# Altium PCB 175-00032, rev1 4-Chan Current Driver.PcbDoc (part 2 of 2)
Units mil, origin at the board's own origin, x right, y up, seen from the top; angles counter-clockwise.
Board outline 3307.09 x 1515.75 mil, 6 copper layers (Top Layer  (*GTL), Mid-Layer 1 (*G1), Internal Plane 1 (*.GP1), InternalPlane2 (*GP2), InternalPlane3 (*.GP3), Bottom Layer  (*GBL)); 61 components, 44 nets, 304 pads, 99 vias.
Unrouted connection lines stored in the file: 1.
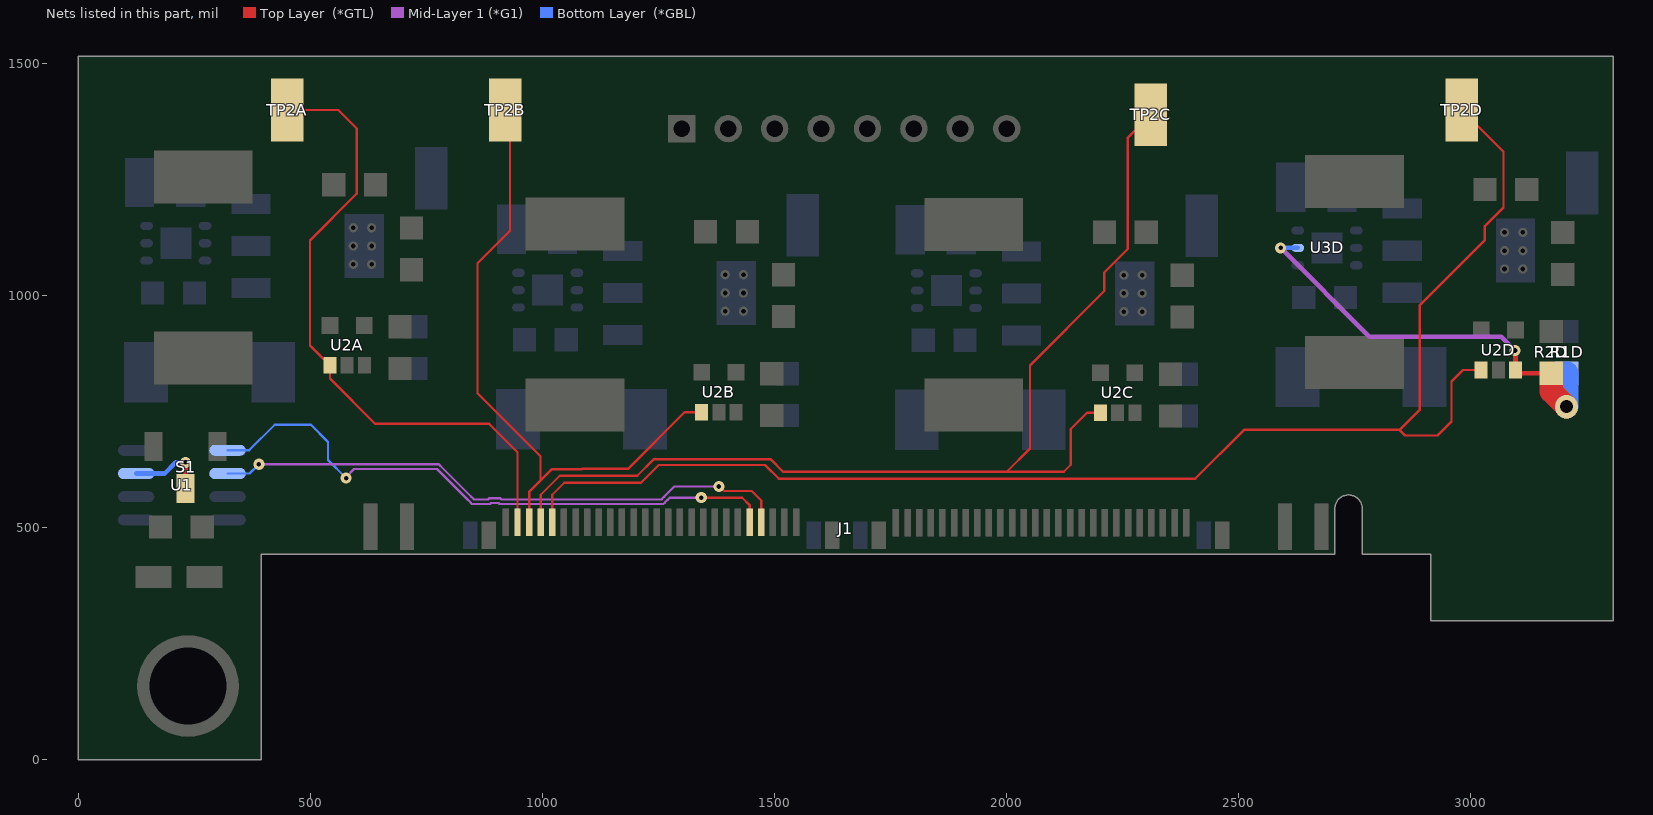
[diagram p6: the nets of this part, all layers, seen from the top]

## Via types
v1: diameter 24, hole 10, Top Layer  (*GTL) to Bottom Layer  (*GBL), 57 vias
v2: diameter 50, hole 28, Top Layer  (*GTL) to Bottom Layer  (*GBL), 38 vias
v3: diameter 28, hole 13, Top Layer  (*GTL) to Bottom Layer  (*GBL), 4 vias

## Nets (pads, with @x,y where several pads share a name; then routed paths per layer and width w, separated by ;. In a path a pad name is that pad's centre, name@x,y a point inside that pad or via, vN(x,y) a via of type N, cw(c..) or ccw(c..) an arc to the next point about the centre after c; other vN are vias at no path point) (continued)
NetR1D_2: R1D.2 R2D.1 U2D.3 U3D.2 | length 915.9
  Top Layer  (*GTL) w10: v1(3095,882) 3096,883 U2D.3@3096,840 3103,833 R2D.1@3173,833
  Top Layer  (*GTL) w50: R2D.1@3173,833 3173,794 v2(3206,761)
  Mid-Layer 1 (*G1) w10: v1(2590,1103) 2781,912 3065,912 v1(3095,882)
  Bottom Layer  (*GBL) w10: v1(2590,1103) U3D.2@2627.01,1103
  Bottom Layer  (*GBL) w50: v2(3206,761) 3207,762 R1D.2@3207,833
NetS1_2: S1.2 U1.7 | length 172.6
  Top Layer  (*GTL) w10: S1.2@231,584.72 v1(231,641)
  Bottom Layer  (*GBL) w10: U1.7@124.57,617 186,617 210,641 v1(231,641)
SLOT_ID0: J1.44 U1.1 | length 1310.4
  Top Layer  (*GTL) w5: v1(1342,565) 1430.31,565 1446.09,549.21 J1.44@1446.09,512.06
  Mid-Layer 1 (*G1) w5: v1(577,607) 577,609.79 594,626.79 772.79,626.79 839.57,560 842.5,557.07 845.43,554.14 848.36,551.21 886.64,551.21 888.92,553.5 905.08,553.5 907.36,551.21 1260.21,551.21 1263.14,554.14 1266.07,557.07 1269,560 1274,565 v1(1342,565)
  Bottom Layer  (*GBL) w5: U1.1@321.43,667 368,667 423,722 501,722 538,685 538,646 v1(577,607)
SLOT_ID1: J1.46 U1.2 | length 1262.1
  Top Layer  (*GTL) w5: v1(1380,589) 1382,589 1391.5,579.5 1450.59,579.5 1471.09,559 J1.46@1471.09,512.06
  Mid-Layer 1 (*G1) w5: v1(389,637) 389.21,636.79 776.93,636.79 779.86,633.86 846.64,567.07 849.57,564.14 852.5,561.21 882.49,561.21 884.78,563.5 909.22,563.5 911.51,561.21 1256.07,561.21 1259,564.14 1261.93,567.07 1283.86,589 v1(1380,589)
  Bottom Layer  (*GBL) w5: U1.2@321.43,617 369,617 v1(389,637)
V_IMON1: J1.4 TP2A.1 U2A.1 | length 1387.5
  Top Layer  (*GTL) w5: TP2A.1@450,1400 560,1400 600,1360 600,1220 499,1119 499,893 U2A.1@542,850 542,821.42 639.42,724 885,724 946.09,662.91 J1.4@946.09,510
V_IMON2: J1.6 TP2B.1 U2B.1 | length 1395.7
  Top Layer  (*GTL) w5: TP2B.1@920,1400 930,1390 930,1140 860,1070 860,790 995.8,654.2 995.8,601.8 ; J1.6@971.09,512.06 971.09,577.09 995.8,601.8 ; U2B.1@1343,749 1306,749 1184,627 1084.96,627 1084.46,626.5 1020.5,626.5 995.8,601.8
V_IMON3: J1.8 TP2C.1 U2C.1 | length 2303.7
  Top Layer  (*GTL) w5: J1.8@996.09,512.06 996.09,571.09 1037,612 1204,612 1240,648 1491,648 1518,621 2000,621 ; U2C.1@2202,748 2173,748 2138,713 2138,636 2123,621 2050,621 2000,621 ; TP2C.1@2310,1390 2261,1341 2261,1101 2210,1050 2210,1010 2050,850 2050,670 2049,670 2000,621
V_IMON4: J1.10 TP2D.1 U2D.1 | length 3080.1
  Top Layer  (*GTL) w5: J1.10@1021.09,512.06 1021.09,571.09 1047,597 1212,597 1250.5,635.5 1479.5,635.5 1509,606 2406,606 2511,711 2846,711 ; 2890,760 2890,755 ; TP2D.1@2980,1400 3070,1310 3070,1190 3030,1150 3030,1120 2890,980 2890,755 ; U2D.1@3022,840 2983,840 2958,815 2958,729 2928,699 2890,699 2858,699 2846,711 ; 2846,711 2890,755
pads on no net: J1.3 J1.5 J1.7 J1.9 J1.13 J1.14 J1.15 J1.16 J1.17 J1.18 J1.19 J1.20 J1.23 J1.24 J1.25 J1.26 J1.27 J1.28 J1.29 J1.30 J1.33 J1.34 J1.35 J1.36 J1.37 J1.38 J1.39 J1.40 J1.55 J1.56 J1.57 J1.58 J1.59 J1.60 J1.61 J1.62 J1.65 J1.66 J1.67 J1.68 J1.69 J1.70 J1.71 J1.72 J1.75 J1.76 J1.77 J1.78 J1.79 J1.80 J1.81 J1.82 J1.85 J1.86 J1.87 J1.88 J1.89 J1.90 J1.91 J1.92 J1.95 J1.96 J1.97 J1.98 J1.99 J1.100 J1.101 J1.102

## Polygon pours and split planes (outlines as drawn)
I_RTN4 on Internal Plane 1 (*.GP1) (split plane): 2844.9,1305.1 1855.1,1305.1 1855.1,1460 1855.1,1484.9 2844.9,1484.9
I_RTN3 on Internal Plane 1 (*.GP1) (split plane): 1844.9,1454.91 1844.9,1300 1845.29,1298.05 1846.4,1296.4 1848.05,1295.29 1850,1294.9 2004.9,1294.9 2004.9,1195.1 1655.15,1195.1 1657.64,1455.13
I_RTN2 on Internal Plane 1 (*.GP1) (split plane): 1644.95,1195.1 955.1,1195.1 955.1,1308 954.92,1308.9 1450,1308.9 1451.95,1309.29 1453.6,1310.4 1454.71,1312.05 1455.1,1314 1455.1,1454.9 1647.44,1454.9
I_RTN1 on Internal Plane 1 (*.GP1) (split plane): 1444.9,1319.1 195.1,1319.1 195.1,1444.94 1444.9,1454.86
GND on Internal Plane 1 (*.GP1) (split plane): 3286.99,442.91 3286.99,320.1 2933.48,320.1 2933.48,442.91 2933.1,446.83 2931.95,450.6 2930.1,454.08 2927.6,457.12 2924.55,459.62 2921.08,461.48 2917.31,462.62 2913.39,463.01 2785.95,463.01 2785.95,541.34 2785.9,541.78 2785.62,546.89 2784.68,552.38 2783.14,557.72 2781.01,562.86 2778.32,567.73 2775.1,572.27 2771.4,576.42 2767.25,580.12 2762.71,583.34 2757.84,586.03 2752.7,588.16 2747.36,589.7 2741.88,590.63 2736.32,590.94 2730.77,590.63 2725.28,589.7 2719.94,588.16 2714.8,586.03 2709.93,583.34 2705.39,580.12 2701.24,576.42 2697.54,572.27 2694.32,567.73 2691.63,562.86 2689.5,557.72 2687.96,552.38 2687.03,546.89 2686.74,541.78 2686.7,541.34 2686.7,463.01 393.7,463.01 389.78,462.62 386.01,461.48 382.54,459.62 379.49,457.12 376.99,454.08 375.13,450.6 373.99,446.83 373.6,442.91 373.6,20.1 20.1,20.1 20.1,1495.65 3286.99,1495.65
I_OUT4 on InternalPlane2 (*GP2) (split plane): 3264.9,885.1 2495.1,885.1 2495.1,1207 2494.71,1208.95 2493.6,1210.6 2490.6,1213.6 2488.95,1214.71 2487,1215.1 1855.1,1215.1 1855.1,1444.9 3264.9,1444.9
I_OUT3 on InternalPlane2 (*GP2) (split plane): 1844.9,1210 1845.29,1208.05 1846.4,1206.4 1848.05,1205.29 1850,1204.9 2484.89,1204.9 2484.9,1204.89 2484.9,882.87 2484.29,881.95 2483.9,880 2484.29,878.05 2484.9,877.13 2484.9,755.1 1675.1,755.1 1675.1,1050 1675.1,1120 1674.71,1121.95 1673.6,1123.6 1656.1,1141.11 1656.1,1444.9 1844.9,1444.9
I_OUT2 on InternalPlane2 (*GP2) (split plane): 1645.9,1139 1646.29,1137.05 1647.4,1135.4 1664.9,1117.89 1664.9,1050 1664.9,755.1 1355.1,755.1 1355.1,1320 1355.1,1444.9 1645.9,1444.9
I_OUT1 on InternalPlane2 (*GP2) (split plane): 1344.9,1320 1344.9,855.43 952.06,854.63 951.95,854.71 950,855.1 755.1,855.1 755.1,1444.9 1344.9,1444.9
+12V on InternalPlane2 (*GP2) (split plane): 3286.99,442.91 3286.99,320.1 2933.48,320.1 2933.48,442.91 2933.1,446.83 2931.95,450.6 2930.1,454.08 2927.6,457.12 2924.55,459.62 2921.08,461.48 2917.31,462.62 2913.39,463.01 2785.95,463.01 2785.95,541.34 2785.9,541.78 2785.62,546.89 2784.68,552.38 2783.14,557.72 2781.01,562.86 2778.32,567.73 2775.1,572.27 2771.4,576.42 2767.25,580.12 2762.71,583.34 2757.84,586.03 2752.7,588.16 2747.36,589.7 2741.88,590.63 2736.32,590.94 2730.77,590.63 2725.28,589.7 2719.94,588.16 2714.8,586.03 2709.93,583.34 2705.39,580.12 2701.24,576.42 2697.54,572.27 2694.32,567.73 2691.63,562.86 2689.5,557.72 2687.96,552.38 2687.03,546.89 2686.74,541.78 2686.7,541.34 2686.7,463.01 393.7,463.01 389.78,462.62 386.01,461.48 382.54,459.62 379.49,457.12 376.99,454.08 375.13,450.6 373.99,446.83 373.6,442.91 373.6,20.1 20.1,20.1 20.1,1495.65 3286.99,1495.65
NetD1D_1 on InternalPlane3 (*.GP3) (split plane): 3157.9,1020.1 2908.1,1020.1 2908.1,1169.9 3157.9,1169.9
NetD1B_1 on InternalPlane3 (*.GP3) (split plane): 1478.9,929.1 1229.1,929.1 1229.1,1078.9 1478.9,1078.9
NetD1C_1 on InternalPlane3 (*.GP3) (split plane): 2337.9,928.1 2088.1,928.1 2088.1,1077.9 2337.9,1077.9
NetD1A_1 on InternalPlane3 (*.GP3) (split plane): 677.9,1030.1 428.1,1030.1 428.1,1179.9 677.9,1179.9
+24V on InternalPlane3 (*.GP3) (split plane): 3286.99,442.91 3286.99,320.1 2933.48,320.1 2933.48,442.91 2933.1,446.83 2931.95,450.6 2930.1,454.08 2927.6,457.12 2924.55,459.62 2921.08,461.48 2917.31,462.62 2913.39,463.01 2785.95,463.01 2785.95,541.34 2785.9,541.78 2785.62,546.89 2784.68,552.38 2783.14,557.72 2781.01,562.86 2778.32,567.73 2775.1,572.27 2771.4,576.42 2767.25,580.12 2762.71,583.34 2757.84,586.03 2752.7,588.16 2747.36,589.7 2741.88,590.63 2736.32,590.94 2730.77,590.63 2725.28,589.7 2719.94,588.16 2714.8,586.03 2709.93,583.34 2705.39,580.12 2701.24,576.42 2697.54,572.27 2694.32,567.73 2691.63,562.86 2689.5,557.72 2687.96,552.38 2687.03,546.89 2686.74,541.78 2686.7,541.34 2686.7,463.01 393.7,463.01 389.78,462.62 386.01,461.48 382.54,459.62 379.49,457.12 376.99,454.08 375.13,450.6 373.99,446.83 373.6,442.91 373.6,20.1 20.1,20.1 20.1,1495.65 3286.99,1495.65

## Other copper
Top Layer  (*GTL):
  text "*.GTL - TOP LAYER GERBER DATA" at 51,-1344.5 h80
Mid-Layer 1 (*G1):
  text "*.G1 - MID LAYER 1 GERBER DATA" at 51,-1344.5 h80
Bottom Layer  (*GBL):
  text "*.GBL - BOTTOM LAYER GERBER DATA" at 51,-1344.5 h80
InternalPlane2 (*GP2) (plane layer: these items are gaps in the copper):
  lines w10: 950,850 930,850 880,850 750,850 750,1450 1350,1450 ; 951.77,849.54 1350,850.35 1350,1450 ; 1350,1320 1350,750 1670,750 ; 1550,1450 1850,1450 1850,1210 2487,1210 2490,1207 2490,750 1670,750 ; 1760,1450 3270,1450 3270,880 2489,880 ; 1350,1450 1651,1450 1651,1139 1670,1120 1670,1050 1670,750
  text "*.GP2 - INTERNAL PLANE LAYER 2 GERBER DATA" at 51,-1339 h80
InternalPlane3 (*.GP3) (plane layer: these items are gaps in the copper):
  lines w10: 423,1025 423,1185 683,1185 683,1025 423,1025 ; 1224,924 1484,924 1484,1084 1224,1084 1224,924 ; 2083,923 2343,923 2343,1083 2083,1083 2083,923 ; 2903,1015 3163,1015 3163,1175 2903,1175 2903,1015
  text "*.GP3- INTERNAL PLANE LAYER 3 GERBER DATA" at 51,-1339 h80
Internal Plane 1 (*.GP1) (plane layer: these items are gaps in the copper):
  lines w10: 950,1308 950,1190 1660,1190 ; 1647.5,1460 1450,1460 ; 1850,1190 2010,1190 2010,1300 ; 1860,1190 1650,1190 1652.59,1460.24 ; 1450,1460 1450,1314 214,1314 190,1314 190,1450 1450,1460 ; 1450,1460 1652.59,1460.24 ; 1652.59,1460.24 1850,1460 ; 1850,1460 1850,1300 2010,1300 ; 1850,1460 1850,1490 2850,1490 2850,1300.26 2849.74,1300 2010,1300
  text "*.GP1 - INTERNAL PLANE LAYER 1 GERBER DATA" at 51,-1350 h80

## Silkscreen, mask and mechanical layers (free items; w line width, h text height)
Top Overlay:
  rectangle: 2950,340 3270,500
  text "IMON_1" at 520,1420 h40
  text "IMON_2" at 980,1420 h40
  text "IMON_4" at 3050,1420 h40
  text "IMON_3" at 2380,1410 h40
  text "PGM" at 365,703 h40
  text "780-00035" at 2910,630 h40
  text "SCH, Rev:" at 2920,540 h40
  text "*.GTO - TOP OVERLAY GERBER DATA" at 51,-1344.5 h80
Bottom Overlay:
  circle w5: c2509,1409 r27.02
  text "PCB, 175-00032 rev 1" at 2670,1460 h30
  text "2011, LCOGT" at 2430,1400 h30
  text "c" at 2520,1400 h30
  text "*GBO - BOTTOM OVERLAY GERBER DATA" at 51,-1344.5 h80
Top Paste:
  text "*.GTP - TOP-SIDE SOLDER PASTE MASK" at 50.99,-1344.51 h80
Bottom Paste:
  text "*.GBP - BOTTOM-SIDE SOLDER PASTE MASK" at 50.99,-1344.51 h80
Top Solder:
  text "*.GTS - TOP SOLDER MASK GERBER DATA" at 51,-1344.5 h80
Bottom Solder:
  rectangle: 2085,1365 2686,1502
  text "*.GBS - BOTTOM SOLDER MASK GERBER DATA" at 51,-1344.5 h80
Mechanical 1:
  lines w39.37: 2706.79,442.91 1653.54,442.91 600.29,442.91 393.7,442.91 393.7,0 0,0 0,442.91 0,738.19 0,1515.75 3307.09,1515.75 3307.09,816.93 3307.09,442.91 3307.09,300 2913.39,300 2913.39,442.91
Mechanical 2:
  lines w10: -13674,-7422 7326,-7422 7326,8578 -13674,8578 -13674,-7422 ; 3271,-7316 ccw(c3321,-7316) 3321,-7366 3651,-7366 ccw(c3651,-7326) 3691,-7326 3691,-7156 ccw(c3651,-7156) 3651,-7116 3271,-7116 3271,-7316 ; 3271,-7026 ccw(c3321,-7026) 3321,-7076 7221,-7076 ccw(c7221,-7026) 7271,-7026 7271,-6836 ccw(c7221,-6836) 7221,-6786 3271,-6786 3271,-7026 ; 3271,-6696 ccw(c3321,-6696) 3321,-6746 5201,-6746 ccw(c5201,-6696) 5251,-6696 5251,-6546 ccw(c5201,-6546) 5201,-6496 3271,-6496 3271,-6696 ; 3271,-6416 ccw(c3311,-6416) 3311,-6456 4121,-6456 ccw(c4121,-6406) 4171,-6406 4171,-6256 ccw(c4121,-6256) 4121,-6206 3271,-6206 3271,-6416 ; 3731,-7326 ccw(c3771,-7326) 3771,-7366 5731,-7366 ccw(c5731,-7326) 5771,-7326 5771,-7156 ccw(c5731,-7156) 5731,-7116 3731,-7116 3731,-7326 ; 4211,-6406 ccw(c4261,-6406) 4261,-6456 5201,-6456 ccw(c5201,-6406) 5251,-6406 5251,-6256 ccw(c5201,-6256) 5201,-6206 4211,-6206 4211,-6406 ; 5291,-6696 ccw(c5341,-6696) 5341,-6746 7221,-6746 ccw(c7221,-6696) 7271,-6696 7271,-6546 ccw(c7221,-6546) 7221,-6496 5291,-6496 5291,-6696 ; 5291,-6406 ccw(c5341,-6406) 5341,-6456 6281,-6456 ccw(c6281,-6406) 6331,-6406 6331,-6256 ccw(c6281,-6256) 6281,-6206 5291,-6206 5291,-6406 ; 5811,-7316 ccw(c5861,-7316) 5861,-7366 6191,-7366 ccw(c6191,-7326) 6231,-7326 6231,-7156 ccw(c6191,-7156) 6191,-7116 5811,-7116 5811,-7316 ; 6271,-7326 ccw(c6311,-7326) 6311,-7366 7221,-7366 ccw(c7221,-7316) 7271,-7316 7271,-7166 ccw(c7221,-7166) 7221,-7116 6271,-7116 6271,-7326 ; 6371,-6406 ccw(c6421,-6406) 6421,-6456 7221,-6456 ccw(c7221,-6406) 7271,-6406 7271,-6256 ccw(c7221,-6256) 7221,-6206 6371,-6206 6371,-6406
  lines w19: -13043,-2748 -7412,-2748 ; -13043,-2409.2 -7412,-2409.2 ; -13103,-4975 ccw(c-12994,-4975) -12994,-5084 -7461,-5084 ccw(c-7461,-4975) -7352,-4975 -7352,-2091 ccw(c-7461,-2091) -7461,-1982 -12994,-1982 ccw(c-12994,-2091) -13103,-2091 -13103,-4975
  lines w20: -13653.94,-6776.12 cw(c-13604,-6851) -13604,-6761 -13144,-6761 cw(c-13144,-6851) -13054,-6851 -13054,-6901 ccw(c-13044,-6901) -13044,-6911 -10404,-6911 cw(c-10404,-7001) -10314,-7001 -10314,-7341 cw(c-10404,-7341) -10329.12,-7390.94 ; 3227.17,-7405.98 cw(c3321,-7316) 3191,-7316 3191,-5646 cw(c3321,-5646) 3321,-5516 7221,-5516 cw(c7221,-5646) 7309.66,-5550.92 ; -13654,-7341 ccw(c-13604,-7341) -13604,-7391 -10404,-7391 ccw(c-10404,-7341) -10354,-7341 -10354,-7001 ccw(c-10404,-7001) -10404,-6951 -13044,-6951 cw(c-13044,-6901) -13094,-6901 -13094,-6851 ccw(c-13144,-6851) -13144,-6801 -13604,-6801 ccw(c-13604,-6851) -13654,-6851 -13654,-7341 ; -6144,-7242 ccw(c-6014,-7242) -6014,-7372 -1274,-7372 ccw(c-1274,-7242) -1144,-7242 -1144,-5652 ccw(c-1274,-5652) -1274,-5522 -6014,-5522 ccw(c-6014,-5652) -6144,-5652 -6144,-7242 ; 3231,-7316 ccw(c3321,-7316) 3321,-7406 7221,-7406 ccw(c7221,-7316) 7311,-7316 7311,-5646 ccw(c7221,-5646) 7221,-5556 3321,-5556 ccw(c3321,-5646) 3231,-5646 3231,-7316
  lines w24: -3594,-7212 -3444,-7212 ; -3594,-6962 -3444,-6962 ; -3594,-6712 -3444,-6712 ; -3594,-6462 -3444,-6462 ; -3594,-6212 -3444,-6212
  lines w30: -14174,-7922 7826,-7922 7826,9078 -14174,9078 -14174,-7922
  lines w50: 3416,-6057 5066,-6057 ; 3416,-5677 5066,-5677 ; 5066,-6057 3406,-6057 3406,-5677 5066,-5677 ; 5066,-6057 5066,-5677
  text "NOTES (UNLESS OTHERWISE SPECIFIED):" at -13354,8054 h90
  text "GENERAL" at -13254,7854 h90
  text "1)" at -13154,7653.95 h75
  text "PCB IS 6-LAYER, .062\" THICK." at -12954,7653.97 h75
  text "2)" at -13154,7503.95 h75
  text "CONSTRUCTION IS SOLDER-MASK-OVER-BARE-COPPER (SMOBC)." at -12954,7503.95 h75
  text "3)" at -13154,7353.95 h75
  text "ACCEPTABILITY SHALL BE BASED ON IPC-A-600, CLASS 2." at -12954,7353.95 h75
  text "4)" at -13154,7203.95 h75
  text "THE FOLLOWING GERBER RS274X PHOTO TOOL FILES SHALL BE USED TO DEFINE ALL CIRCUIT FEATURES:" at -12954,7203.95 h75
  text "*.GTL - TOP LAYER GERBER DATA" at -12680,6993 h80
  text "*.G1 - MID LAYER 1 GERBER DATA" at -12680,6839.33 h80
  text "*.GP1 - INTERNAL PLANE LAYER 1 GERBER DATA" at -12715,6665 h80
  text "*.GP2 - INTERNAL PLANE LAYER 2 GERBER DATA" at -12718,6510.67 h80
  text "*.GP3- INTERNAL PLANE LAYER 3 GERBER DATA" at -12718,6357 h80
  text "*.GBL - BOTTOM LAYER GERBER DATA" at -12680,5610 h80
  text "*.GTO - TOP OVERLAY GERBER DATA" at -12680,5456.34 h80
  text "*.GTS - TOP SOLDER MASK GERBER DATA" at -12680,5302.67 h80
  text "*.GTP - TOP-SIDE SOLDER PASTE MASK" at -12680.01,5149 h80
  text "*GBO - BOTTOM OVERLAY GERBER DATA" at -12680,4995.34 h80
  text "*.GBS - BOTTOM SOLDER MASK GERBER DATA" at -12680,4841.67 h80
  text "*.GBP - BOTTOM-SIDE SOLDER PASTE MASK" at -12680.01,4688 h80
  text "5)" at -13251,3972.23 h75
  text "THE PHOTO TOOL SHALL NOT BE COMPENSATED WITHOUT PRIOR ENGINEERING APPROVAL." at -13051,3972.23 h75
  text "PCB DESIGNER: RICH LOBDILL   PH (805) 880-1621  FAX (805) 961-1792." at -13051,3822.28 h75
  text "FABRICATION TOLERANCES" at -13196,3496 h90
  text "6)" at -13096,3295.95 h75
  text "END PRODUCT CONDUCTOR WIDTHS AND PAD DIAMETERS SHALL NOT VARY MORE THAN" at -12896,3295.95 h75
  text "0.002\" FROM THE 1:1 DIMENSIONS OF THE MASTER ARTWORK." at -12896,3146 h75
  text "7)" at -13096,2995.95 h75
  text "THE CONDUCTIVE PATTERN SHALL BE POSITIONED SO THAT THE LOCATION OF ANY PAD OR" at -12896,2995.95 h75
  text "LAND SHALL BE WITHIN 0.005\" DIAMETER TO THE TRUE POSITION OF THE HOLE IT CIRCUMSCRIBES." at -12896,2846 h75
  text "8)" at -13096,2695.95 h75
  text "ALL DRILL HOLE SIZES AND TOLERANCES APPLY AFTER PLATING." at -12896,2695.95 h75
  text "9)" at -13096,2545.95 h75
  text "THE MINIMUM ANNULAR RING SHALL BE 0.005\"." at -12896,2545.95 h75
  text "10)" at -13151,2395.95 h75
  text "BOW AND TWIST SHALL NOT EXCEED 0.010\" PER INCH." at -12896,2395.95 h75
  text "11)" at -13141,2245.95 h75
  text "FOR PCB ROUTING DIMENSIONS: .XXX = +/-.005\"  .XX = +/-.020\"" at -12896,2245.95 h75
  text "MATERIAL" at -13196,2046 h90
  text "12)" at -13151,1845.95 h75
  text "BASE MATERIAL IS FR4 EPOXY FIBERGLASS" at -12889,1840 h75
  text "SEE STACK-UP LEGEND FOR COPPER CLADDING CALL OUTS" at -12889,1700 h75
  text "13)" at -13151,1695.95 h75
  text "PLATING" at -13196,1496 h90
  text "14)" at -13151,1300.95 h75
  text "ALL HOLES AND CONDUCTIVE SURFACES SHALL BE PLATED WITH A MINIMUM OF 0.001\" COPPER." at -12896,1300.95 h75
  text "15)" at -13151,1150.95 h75
  text "AFTER SOLDERMASK, ALL EXPOSED HOLES AND CONDUCTIVE SURFACES SHALL BE COATED" at -12896,1150.95 h75
  text "WITH A GOLD IMMERSION PLATING TO PRESERVE SOLDERABILITY." at -12889,1000 h75
  text "COATINGS" at -13196,801 h90
  text "16)" at -13146,605.95 h75
  text "THE SOLDERMASK SHALL BE BLACK LIQUID PHOTO-IMAGEABLE PER IPC-SM-840, TYPE-B, CLASS 2." at -12896,605.95 h75
  text "17)" at -13151,455.95 h75
  text "THE SOLDERMASK REGISTRATION ALLOWANCE IS 0.003\".  THERE SHALL BE NO SOLDERMASK ON" at -12896,455.95 h75
  text "ANY SOLDER PAD OR LAND." at -12896,305.95 h75
  text "MARKING" at -13196,106 h90
  text "18)" at -13151,-89.05 h75
  text "THE LEGEND SHALL BE SCREEN-PRINTED USING PERMANENT YELLOW EPOXY INK." at -12896,-89.05 h75
  text "19)" at -13151,-239.05 h75
  text "THE SCREEN PRINTING REGISTRATION ALLOWANCE IS 0.007\".  THERE SHALL BE NO INK ON ANY" at -12896,-239.05 h75
  text "SOLDER PAD OR LAND." at -12896,-389 h75
  text "20)" at -13161,-539.05 h75
  text "THE VENDOR CODE AND UL FLAMMABILITY RATING MAY BE ETCHED IN THE FOIL OR MARKED IN" at -12896,-539.05 h75
  text "PERMANENT EPOXY INK (VENDOR'S OPTION)." at -12896,-689 h75
  text "ELECTRICAL TESTING" at -13196,-889 h90
  text "21)" at -13151,-1084.05 h75
  text "ALL BOARDS SHALL BE ELECTRICALLY TESTED TO THE SUPPLIED IPC-D-356A NET LIST" at -12896,-1084.05 h75
  text "FOR CONTINUITY, OPENS AND SHORTS." at -12896,-1234 h75
  text "Layer Stack Up Detail for: 175-00032, rev1 4-Chan Current Driver.PcbDoc" at -13043,-2248.5 h78
  text "Layer" at -13043,-2535.7 h78
  text "COPPER THICKNESS" at -10215,-2616 h100
  text "Name" at -13043,-2691.7 h78
  text "Top Layer  (*GTL)" at -13043,-2934.71 h109
  text "1/2 oz,  1 oz Finished" at -10828,-2951 h100
  text "1 oz" at -9922,-3244 h100
  text "Mid-Layer 1 (*G1)" at -13043,-3289.12 h109
  text "Internal Plane 1 (*.GP1)" at -13043,-3643.54 h109
  text "1 oz" at -9938,-3648 h100
  text "InternalPlane2 (*GP2)" at -13043,-3997.96 h109
  text "1 oz" at -9938,-4034 h100
  text "InternalPlane3 (*.GP3)" at -13043,-4352.37 h109
  text "1 oz" at -9938,-4372 h100
  text "1/2 oz,  1 oz Finished" at -10762,-4696 h100
  text "Bottom Layer  (*GBL)" at -13043,-4706.79 h109
  text "Las Cumbres Observatory, Inc." at 5236,-5697 h90
  text "Las Cumbres Observatory" at 3466,-5817 h150
  text "PRIMARY PCB SPECIFICATIONS" at -5697,-5832 h200
  text "6740 Cortona Dr." at 5676,-5851 h90
  text "Global Telescope Network" at 3626,-5977 h125
  text "Goleta, CA 93117" at 5626,-6001 h90
  text "(REFER TO COMPLETE SPEC LISTING AT LEFT FOR FURTHER DETAILS)" at -6044,-6037 h100
  text "www.lcogt.net" at 5766,-6147 h90
  text "DATE" at 3291,-6257.8 h32
  text "DESIGNED" at 4231,-6257.8 h32
  text "DRAWN" at 5311,-6257.8 h32
  text "SCALE" at 6391,-6257.8 h32
  text "NUMBER OF LAYERS" at -5944,-6287 h150
  text "6" at -2394,-6287.02 h150
  text "Rich Lobdill" at 5616,-6357 h55
  text "Rich Lobdill" at 4491,-6362 h55
  text "1 : 1" at 6676,-6376 h90
  text "8/4/2011" at 3321,-6383 h90
  text "FINISHED THICKNESS" at -5944,-6537 h150
  text ".062\"" at -2569,-6537 h150
  text "CHECKED/DATE" at 3291,-6547.8 h32
  text "APPROVED/DATE" at 5311,-6547.8 h32
  text "BASE MATERIAL" at -5944,-6787 h150
  text "FR4" at -2644,-6787 h150
  text "TITLE" at 3291,-6837.8 h32
  text "NOTICE" at -13599,-6946 h100
  text "175-00032, 4-Chan Current Driver Module" at 3511,-6982 h100
  text "GOLD IMMERSION" at -3138,-7004 h150
  text "PLATING TYPE" at -5944,-7037 h150
  text "THIS DRAWING EMBODIES A PROPRIETARY DESIGN OWNED BY LAS CUMBRES" at -13564,-7061 h60
  text "OBSERVATORY.  IT IS SUBMITTED FOR A SPECIFIC PURPOSE UNDER A CON-" at -13564,-7161 h60
  text "SIZE" at 3291,-7167.8 h32
  text "DOC NO." at 3751,-7167.8 h32
  text "REV" at 5831,-7167.8 h32
  text "SHEET" at 6291,-7167.8 h32
  text "FIDENTIAL RELATIONSHIP, AND EXCEPT FOR PURPOSES EXPRESSLY GRANTED" at -13564,-7256 h60
  text "OF" at 6721,-7271 h60
  text "SOLDER MASK COLOR" at -5944,-7287 h150
  text "BLACK" at -2519,-7287 h150
  text "1" at 6551,-7291 h100
  text "X" at 6951,-7291 h100
  text "1" at 5976,-7304 h130
  text "-" at 4306,-7306 h130
  text "GPT" at 5025.72,-7320.8 h130
  text "C" at 3426,-7322 h100
  text "IN WRITING, ALL RIGHTS ARE RESERVED BY LAS CUMBRES OBSERVATORY." at -13564,-7346 h60
Mechanical 5:
  text "175-00032, 4-Chan Current Driver Module" at 96.03,-911.42 h80
  text "LAS CUMBRES OBSERVATORY     8/4/2011" at 96.03,-1061.43 h80
Drill Drawing:
  lines w10: -13674,-7422 7326,-7422 7326,8578 -13674,8578 -13674,-7422 ; 3271,-7316 ccw(c3321,-7316) 3321,-7366 3651,-7366 ccw(c3651,-7326) 3691,-7326 3691,-7156 ccw(c3651,-7156) 3651,-7116 3271,-7116 3271,-7316 ; 3271,-7026 ccw(c3321,-7026) 3321,-7076 7221,-7076 ccw(c7221,-7026) 7271,-7026 7271,-6836 ccw(c7221,-6836) 7221,-6786 3271,-6786 3271,-7026 ; 3271,-6706 ccw(c3311,-6706) 3311,-6746 4731,-6746 ccw(c4731,-6696) 4781,-6696 4781,-6546 ccw(c4731,-6546) 4731,-6496 3271,-6496 3271,-6706 ; 3731,-7326 ccw(c3771,-7326) 3771,-7366 5731,-7366 ccw(c5731,-7326) 5771,-7326 5771,-7156 ccw(c5731,-7156) 5731,-7116 3731,-7116 3731,-7326 ; 4821,-6696 ccw(c4871,-6696) 4871,-6746 6281,-6746 ccw(c6281,-6696) 6331,-6696 6331,-6546 ccw(c6281,-6546) 6281,-6496 4821,-6496 4821,-6696 ; 5811,-7316 ccw(c5861,-7316) 5861,-7366 6191,-7366 ccw(c6191,-7326) 6231,-7326 6231,-7156 ccw(c6191,-7156) 6191,-7116 5811,-7116 5811,-7316 ; 6271,-7326 ccw(c6311,-7326) 6311,-7366 7221,-7366 ccw(c7221,-7316) 7271,-7316 7271,-7166 ccw(c7221,-7166) 7221,-7116 6271,-7116 6271,-7326 ; 6371,-6696 ccw(c6421,-6696) 6421,-6746 7221,-6746 ccw(c7221,-6696) 7271,-6696 7271,-6546 ccw(c7221,-6546) 7221,-6496 6371,-6496 6371,-6696
  lines w20: -13648.94,-6791.12 cw(c-13599,-6866) -13599,-6776 -13139,-6776 cw(c-13139,-6866) -13049,-6866 -13049,-6916 ccw(c-13039,-6916) -13039,-6926 -10399,-6926 cw(c-10399,-7016) -10309,-7016 -10309,-7356 cw(c-10399,-7356) -10324.12,-7405.94 ; 3225.92,-7404.66 cw(c3321,-7316) 3191,-7316 3191,-6496 cw(c3271,-6496) 3271,-6416 7221,-6416 cw(c7221,-6546) 7309.66,-6450.92 ; -13649,-7356 ccw(c-13599,-7356) -13599,-7406 -10399,-7406 ccw(c-10399,-7356) -10349,-7356 -10349,-7016 ccw(c-10399,-7016) -10399,-6966 -13039,-6966 cw(c-13039,-6916) -13089,-6916 -13089,-6866 ccw(c-13139,-6866) -13139,-6816 -13599,-6816 ccw(c-13599,-6866) -13649,-6866 -13649,-7356 ; 3231,-7316 ccw(c3321,-7316) 3321,-7406 7221,-7406 ccw(c7221,-7316) 7311,-7316 7311,-6546 ccw(c7221,-6546) 7221,-6456 3271,-6456 ccw(c3271,-6496) 3231,-6496 3231,-7316
  lines w30: -14174,-7922 7826,-7922 7826,9078 -14174,9078 -14174,-7922
  text ".Legend" at -3200,-3305 h100
  text "DESIGNED" at 3291,-6547.8 h32
  text "DRAWN" at 4841,-6547.8 h32
  text "SCALE" at 6391,-6547.8 h32
  text "Rich Lobdill" at 3777,-6644 h55
  text "Rich Lobdill" at 5338,-6646 h55
  text "1 : 1" at 6676,-6666 h90
  text "TITLE" at 3291,-6837.8 h32
  text "NOTICE" at -13594,-6961 h100
  text "175-00032, 4-Chan Current Driver Module" at 3508,-6982 h100
  text "THIS DRAWING EMBODIES A PROPRIETARY DESIGN OWNED BY LAS CUMBRES" at -13559,-7076 h60
  text "SIZE" at 3291,-7167.8 h32
  text "DOC NO." at 3751,-7167.8 h32
  text "REV" at 5831,-7167.8 h32
  text "SHEET" at 6291,-7167.8 h32
  text "OBSERVATORY.  IT IS SUBMITTED FOR A SPECIFIC PURPOSE UNDER A CON-" at -13559,-7176 h60
  text "FIDENTIAL RELATIONSHIP, AND EXCEPT FOR PURPOSES EXPRESSLY GRANTED" at -13559,-7271 h60
  text "OF" at 6721,-7271 h60
  text "2" at 6536,-7291 h100
  text "X" at 6951,-7291 h100
  text "-" at 4306,-7306 h130
  text "1" at 5971,-7306 h130
  text "C" at 3426,-7322 h120
  text "GD1" at 5126,-7322 h120
  text "IN WRITING, ALL RIGHTS ARE RESERVED BY LAS CUMBRES OBSERVATORY." at -13559,-7361 h60

## Dimensions
0,1515.75 to 3307.09,1515.75 on Mechanical 2
78.74,0 to 0,1515.75 on Mechanical 2
393.7,0 to 0,0 on Mechanical 2

## Text inside footprints (layer, text, board x,y; h text height)
J1: Bottom Overlay "PC07" at 2662.09,574 h30 r270; Bottom Overlay "PC01" at 704,628 h30; Bottom Overlay "1" at 846.46,600.39 h40